# EAGLE board elysium_v0 (EAGLE 6.5.0)
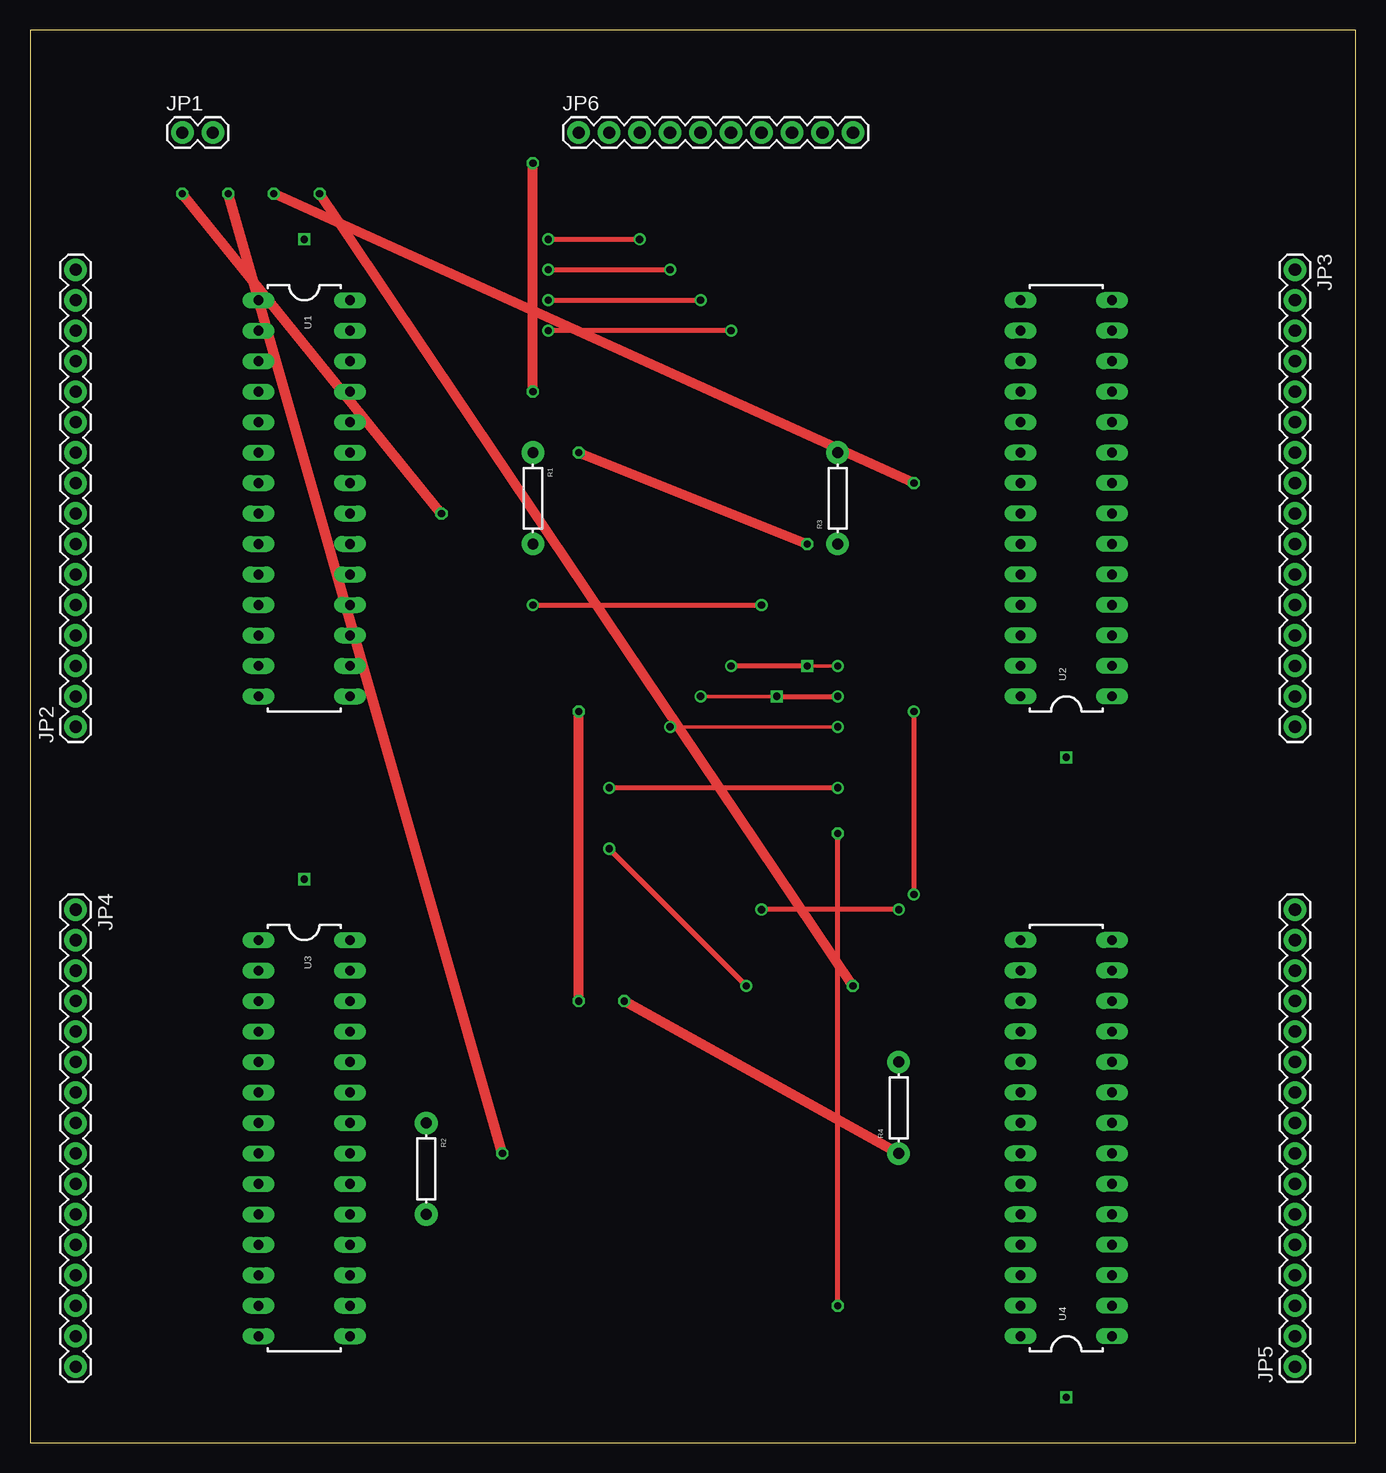
[diagram p0: board, top side]
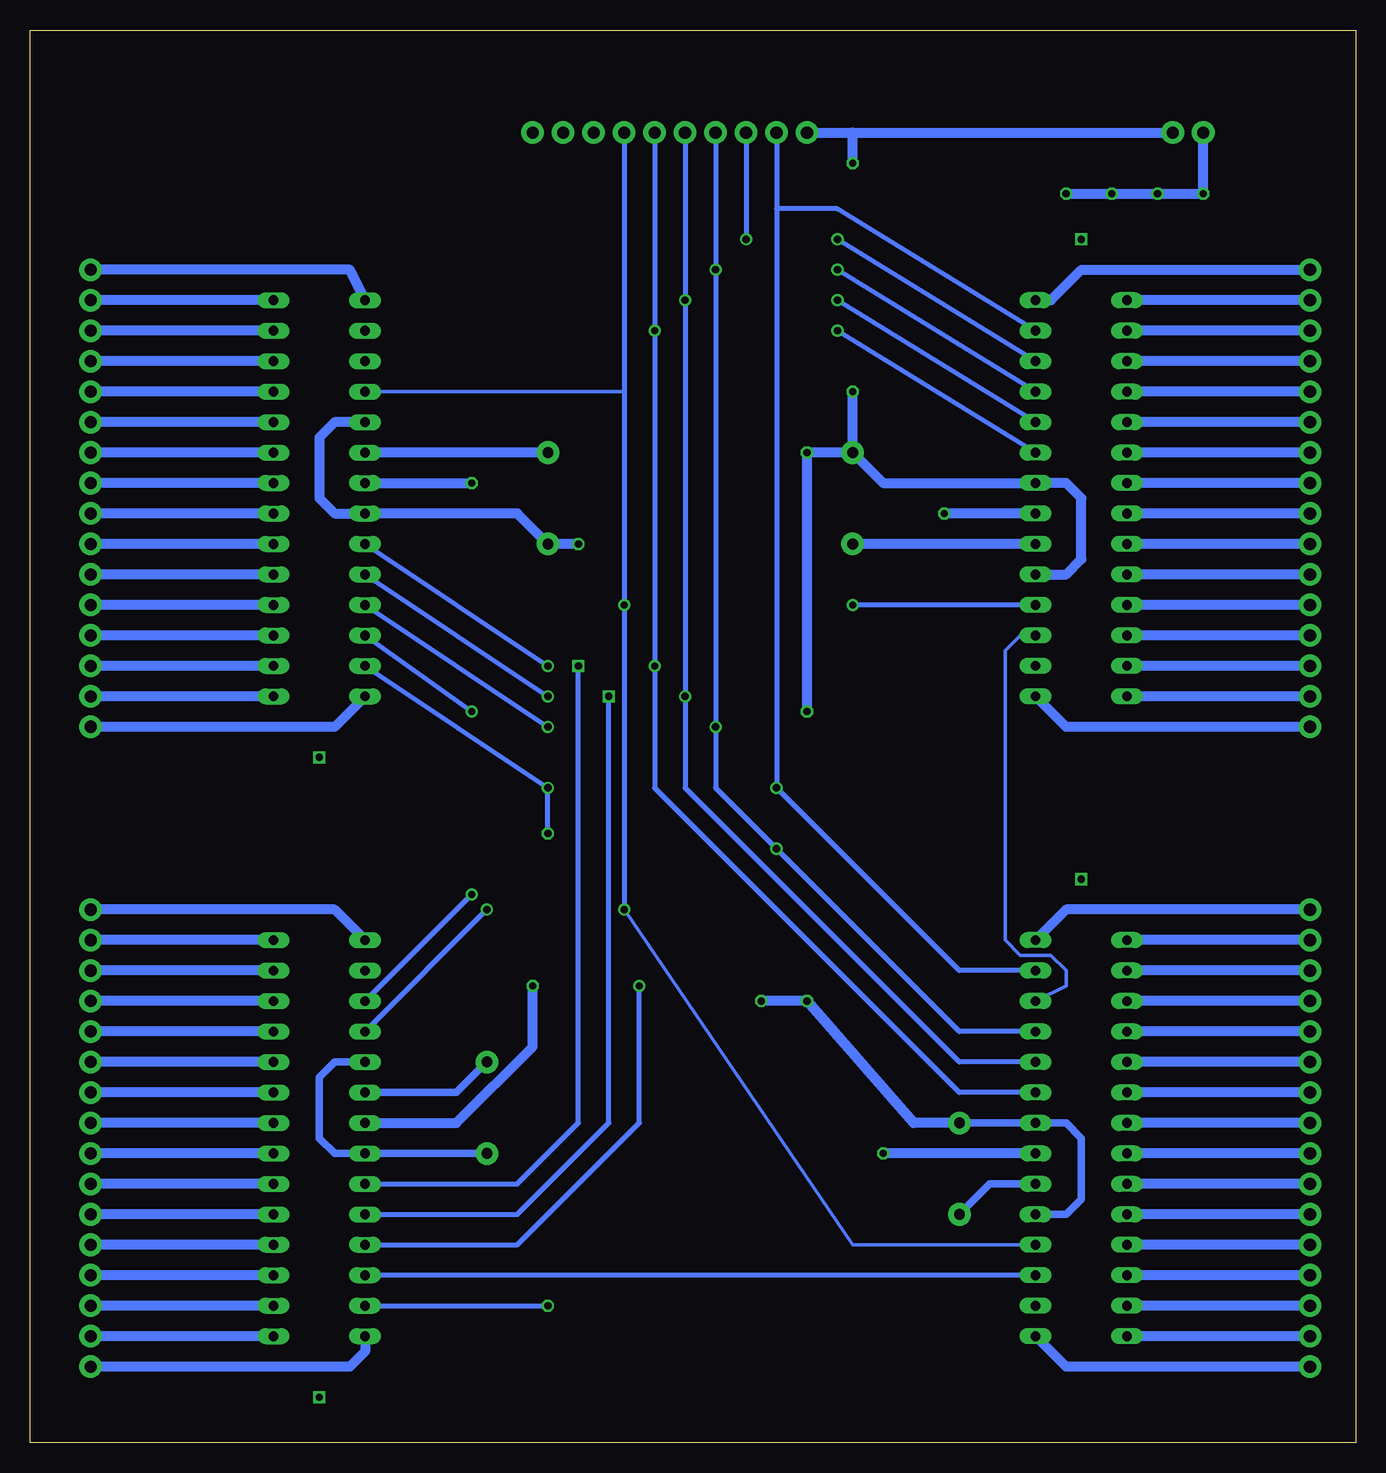
[diagram p1: board, bottom side, seen from below]

Size 110.47 x 117.78 mm. Coordinates in mm from the lower left corner, seen from the top.
Outline: 0,0 110.47,0 110.47,117.78 0,117.78 0,0
Copper layers (1*16): Top 0.035mm / dielectric 1.5mm / Bottom 0.035mm
Design rules "default": minimum track width 10mil, minimum drill 24mil, track to track 8mil, track to pad 8mil, pad to pad 8mil, via to via 8mil, smd to smd 8mil, copper to edge 40mil, drill to drill 8mil, minimum pad ring 10mil, minimum via ring 8mil, stop-mask expansion 4mil, vias tented up to drill 0mil, thermal gap 10mil

## Footprints (pad centres in the part's own frame; a part is rotated, then mirrored left to right if it is on the bottom)
1X02 = drill 1.016 pad 1.88: 1 0,0; 2 2.54,0
1X16 = drill 1.016 pad 1.88: 1 0,0; 2 2.54,0; 3 5.08,0; 4 7.62,0; 5 10.16,0; 6 12.7,0; 7 15.24,0; 8 17.78,0; 9 20.32,0; 10 22.86,0; 11 25.4,0; 12 27.94,0; 13 30.48,0; 14 33.02,0; 15 35.56,0; 16 38.1,0
1X10 = drill 1.016 pad 1.88: 1 0,0; 2 2.54,0; 3 5.08,0; 4 7.62,0; 5 10.16,0; 6 12.7,0; 7 15.24,0; 8 17.78,0; 9 20.32,0; 10 22.86,0
AXIAL-0.3EZ = drill 0.9 pad 1.88: P$1 -3.81,0; P$2 3.81,0
DIL28-3 = drill 0.813 long: 1 -16.51,-3.81; 2 -13.97,-3.81; 3 -11.43,-3.81; 4 -8.89,-3.81; 5 -6.35,-3.81; 6 -3.81,-3.81; 7 -1.27,-3.81; 8 1.27,-3.81; 9 3.81,-3.81; 10 6.35,-3.81; 11 8.89,-3.81; 12 11.43,-3.81; 13 13.97,-3.81; 14 16.51,-3.81; 15 16.51,3.81; 16 13.97,3.81; 17 11.43,3.81; 18 8.89,3.81; 19 6.35,3.81; 20 3.81,3.81; 21 1.27,3.81; 22 -1.27,3.81; 23 -3.81,3.81; 24 -6.35,3.81; 25 -8.89,3.81; 26 -11.43,3.81; 27 -13.97,3.81; 28 -16.51,3.81

## Placement (x,y rotation side)
JP1  M02PTH  [1X02]  12.7,109.22 0 top
JP2  M16PTH  [1X16]  3.81,59.69 90 top
JP3  M16PTH  [1X16]  105.41,97.79 270 top
JP4  M16PTH  [1X16]  3.81,44.45 270 top
JP5  M16PTH  [1X16]  105.41,6.35 90 top
JP6  M10"  [1X10]  45.72,109.22 0 top
R1  [AXIAL-0.3EZ]  41.91,78.74 270 top
R2  [AXIAL-0.3EZ]  33.02,22.86 270 top
R3  [AXIAL-0.3EZ]  67.31,78.74 90 top
R4  [AXIAL-0.3EZ]  72.39,27.94 90 top
U1  TLC5940-NT  [DIL28-3]  22.86,78.74 270 top
U2  TLC5940-NT  [DIL28-3]  86.36,78.74 90 top
U3  TLC5940-NT  [DIL28-3]  22.86,25.4 270 top
U4  TLC5940-NT  [DIL28-3]  86.36,25.4 90 top

## Library data of the parts
JP1-JP6 = SparkFun-Connectors
R1-R4 = SparkFun-Resistors
U1-U4 = SparkFun-DigitalIC

## Nets
BLANK: JP6.6 U1.23 U2.23 U3.23 U4.23
GND: JP1.2 JP6.1 R1.P$1 R2.P$1 R3.P$1 R4.P$1 U1.19 U1.22 U2.19 U2.22 U3.19 U3.22 U4.19 U4.22
GSCLK: JP6.7 U1.18 U2.18 U3.18 U4.18
N$1: JP2.16 U1.28
N$2: JP2.15 U1.1
N$3: JP2.14 U1.2
N$4: JP2.13 U1.3
N$5: JP2.12 U1.4
N$6: JP2.11 U1.5
N$7: JP2.10 U1.6
N$8: JP2.9 U1.7
N$9: JP2.8 U1.8
N$10: JP2.7 U1.9
N$11: JP2.6 U1.10
N$12: JP2.5 U1.11
N$13: JP2.4 U1.12
N$14: JP2.3 U1.13
N$15: JP2.2 U1.14
N$16: JP2.1 U1.15
N$17: JP4.1 U3.28
N$18: JP4.2 U3.1
N$19: JP4.3 U3.2
N$20: JP4.4 U3.3
N$21: JP4.5 U3.4
N$22: JP4.6 U3.5
N$23: JP4.7 U3.6
N$24: JP4.8 U3.7
N$25: JP4.9 U3.8
N$26: JP4.10 U3.9
N$27: JP4.11 U3.10
N$28: JP4.12 U3.11
N$29: JP4.13 U3.12
N$30: JP4.14 U3.13
N$31: JP4.15 U3.14
N$32: JP4.16 U3.15
N$33: JP3.16 U2.28
N$34: JP3.15 U2.1
N$35: JP3.14 U2.2
N$36: JP3.13 U2.3
N$37: JP3.12 U2.4
N$38: JP3.11 U2.5
N$39: JP3.10 U2.6
N$40: JP3.9 U2.7
N$41: JP3.8 U2.8
N$42: JP3.7 U2.9
N$43: JP3.6 U2.10
N$44: JP3.5 U2.11
N$45: JP3.4 U2.12
N$46: JP3.3 U2.13
N$47: JP3.2 U2.14
N$48: JP3.1 U2.15
N$49: JP5.1 U4.28
N$50: JP5.2 U4.1
N$51: JP5.3 U4.2
N$52: JP5.4 U4.3
N$53: JP5.5 U4.4
N$54: JP5.6 U4.5
N$55: JP5.7 U4.6
N$56: JP5.8 U4.7
N$57: JP5.9 U4.8
N$58: JP5.10 U4.9
N$59: JP5.11 U4.10
N$60: JP5.12 U4.11
N$61: JP5.13 U4.12
N$62: JP5.14 U4.13
N$63: JP5.15 U4.14
N$64: JP5.16 U4.15
N$65: U1.17 U3.26
N$66: U3.17 U4.26
N$67: U2.26 U4.17
N$68: R1.P$2 U1.20
N$70: R2.P$2 U3.20
N$71: JP6.8
N$72: JP6.9
N$73: JP6.10
N$75: R3.P$2 U2.20
N$77: R4.P$2 U4.20
SCLK: JP6.4 U1.25 U2.25 U3.25 U4.25
SIN: JP6.3 U1.26
VCC: JP1.1 U1.21 U2.21 U3.21 U4.21
VPRG: JP6.2 U1.27 U2.27 U3.27 U4.27
XLAT: JP6.5 U1.24 U2.24 U3.24 U4.24

## Tracks (layer width: path | path; a pad name or v marks a point on that pad's centre or on a via)
BLANK  (via drill 0.6)
  Top 0.305: v67.31,64.77 v64.77,64.77
  Top 0.406: v58.42,92.71 v43.18,92.71 | v64.77,64.77 v58.42,64.77
  Bottom 0.406: JP6.6 v58.42,92.71 v58.42,64.77 58.42,54.61 33.02,29.21 U3.23 | U1.23 v43.18,92.71 | U2.23 v67.31,64.77 | U4.23 69.85,21.59 64.77,26.67 v64.77,64.77
GND  (via drill 0.6)
  Top 0.813: v41.91,87.63 v41.91,106.68 | v45.72,82.55 v64.77,74.93 | v45.72,36.83 v45.72,60.96 | v49.53,36.83 R4.P$1
  Bottom 0.61: U3.19 24.13,19.05 22.86,20.32 22.86,25.4 24.13,26.67 U3.22 R2.P$1 | U4.19 85.09,31.75 86.36,30.48 86.36,25.4 85.09,24.13 U4.22 R4.P$1
  Bottom 0.813: U1.19 24.13,72.39 22.86,73.66 22.86,78.74 24.13,80.01 U1.22 39.37,80.01 R1.P$1 | U2.19 85.09,85.09 86.36,83.82 86.36,78.74 85.09,77.47 U2.22 69.85,77.47 R3.P$1 v64.77,74.93 | JP6.1 41.91,109.22 | 41.91,109.22 JP1.2 | R1.P$1 v41.91,87.63 | v41.91,106.68 41.91,109.22 | R1.P$1 v45.72,82.55 v45.72,60.96 | R2.P$1 36.83,26.67 v45.72,36.83 v49.53,36.83
GSCLK  (via drill 0.6)
  Top 0.406: v72.39,44.45 v60.96,44.45 | v41.91,69.85 v60.96,69.85
  Bottom 0.305: U2.18 60.96,87.63 | U3.18 41.91,16.51 v60.96,44.45
  Bottom 0.406: JP6.7 60.96,87.63 v60.96,69.85 v60.96,44.45 | U4.18 v72.39,44.45 | U1.18 v41.91,69.85
N$1
  Bottom 0.813: U1.28 25.4,95.25 22.86,97.79 JP2.16
N$2
  Bottom 0.813: JP2.15 U1.1
N$3
  Bottom 0.813: JP2.14 U1.2
N$4
  Bottom 0.813: JP2.13 U1.3
N$5
  Bottom 0.813: JP2.12 U1.4
N$6
  Bottom 0.813: JP2.11 U1.5
N$7
  Bottom 0.813: JP2.10 U1.6
N$8
  Bottom 0.813: JP2.9 U1.7
N$9
  Bottom 0.813: JP2.8 U1.8
N$10
  Bottom 0.813: JP2.7 U1.9
N$11
  Bottom 0.813: JP2.6 U1.10
N$12
  Bottom 0.813: JP2.5 U1.11
N$13
  Bottom 0.813: JP2.4 U1.12
N$14
  Bottom 0.813: JP2.3 U1.13
N$15
  Bottom 0.813: JP2.2 U1.14
N$16
  Bottom 0.813: JP2.1 24.13,59.69 U1.15
N$17
  Bottom 0.813: JP4.1 24.13,44.45 U3.28
N$18
  Bottom 0.813: JP4.2 U3.1
N$19
  Bottom 0.813: JP4.3 U3.2
N$20
  Bottom 0.813: JP4.4 U3.3
N$21
  Bottom 0.813: JP4.5 U3.4
N$22
  Bottom 0.813: JP4.6 U3.5
N$23
  Bottom 0.813: JP4.7 U3.6
N$24
  Bottom 0.813: JP4.8 U3.7
N$25
  Bottom 0.813: JP4.9 U3.8
N$26
  Bottom 0.813: JP4.10 U3.9
N$27
  Bottom 0.813: JP4.11 U3.10
N$28
  Bottom 0.813: JP4.12 U3.11
N$29
  Bottom 0.813: JP4.13 U3.12
N$30
  Bottom 0.813: JP4.14 U3.13
N$31
  Bottom 0.813: JP4.15 U3.14
N$32
  Bottom 0.813: JP4.16 24.13,6.35 U3.15
N$33
  Bottom 0.813: U2.28 85.09,59.69 JP3.16
N$34
  Bottom 0.813: U2.1 JP3.15
N$35
  Bottom 0.813: U2.2 JP3.14
N$36
  Bottom 0.813: U2.3 JP3.13
N$37
  Bottom 0.813: U2.4 JP3.12
N$38
  Bottom 0.813: U2.5 JP3.11
N$39
  Bottom 0.813: U2.6 JP3.10
N$40
  Bottom 0.813: U2.7 JP3.9
N$41
  Bottom 0.813: U2.8 JP3.8
N$42
  Bottom 0.813: U2.9 JP3.7
N$43
  Bottom 0.813: U2.10 JP3.6
N$44
  Bottom 0.813: U2.11 JP3.5
N$45
  Bottom 0.813: U2.12 JP3.4
N$46
  Bottom 0.813: U2.13 JP3.3
N$47
  Bottom 0.813: U2.14 JP3.2
N$48
  Bottom 0.813: U2.15 83.82,97.79 JP3.1
N$49
  Bottom 0.813: U4.28 82.55,7.62 83.82,6.35 JP5.1
N$50
  Bottom 0.813: U4.1 JP5.2
N$51
  Bottom 0.813: U4.2 JP5.3
N$52
  Bottom 0.813: U4.3 JP5.4
N$53
  Bottom 0.813: U4.4 JP5.5
N$54
  Bottom 0.813: U4.5 JP5.6
N$55
  Bottom 0.813: U4.6 JP5.7
N$56
  Bottom 0.813: U4.7 JP5.8
N$57
  Bottom 0.813: U4.8 JP5.9
N$58
  Bottom 0.813: U4.9 JP5.10
N$59
  Bottom 0.813: U4.10 JP5.11
N$60
  Bottom 0.813: U4.11 JP5.12
N$61
  Bottom 0.813: U4.12 JP5.13
N$62
  Bottom 0.813: U4.13 JP5.14
N$63
  Bottom 0.813: U4.14 JP5.15
N$64
  Bottom 0.813: U4.15 85.09,44.45 JP5.16
N$65
  Bottom 0.305: U1.17 27.94,67.31 29.21,66.04 29.21,41.91 27.94,40.64 25.4,40.64 24.13,39.37 24.13,38.1 U3.26
N$66
  Bottom 0.406: U3.17 U4.26
N$67  (via drill 0.6)
  Top 0.406: v73.66,60.96 v73.66,45.72
  Bottom 0.406: U2.26 v73.66,60.96 | v73.66,45.72 U4.17
N$68
  Bottom 0.813: U1.20 R1.P$2
N$69  (via drill 0.6)
  other vias: 86.36,57.15
N$70
  Bottom 0.61: R2.P$2 30.48,21.59 U3.20
N$74  (via drill 0.6)
  other vias: 22.86,46.99
N$75
  Bottom 0.813: R3.P$2 U2.20
N$76  (via drill 0.6)
  other vias: 22.86,100.33
N$77
  Bottom 0.61: R4.P$2 74.93,29.21 U4.20
N$78  (via drill 0.6)
  other vias: 86.36,3.81
SCLK  (via drill 0.6)
  Top 0.305: v67.31,59.69 v53.34,59.69
  Top 0.406: v43.18,97.79 v53.34,97.79 | v59.69,38.1 v48.26,49.53
  Bottom 0.406: JP6.4 v53.34,97.79 v53.34,59.69 53.34,54.61 v48.26,49.53 33.02,34.29 U3.25 | U1.25 v43.18,97.79 | U2.25 v67.31,59.69 | U4.25 69.85,16.51 59.69,26.67 v59.69,38.1
SIN  (via drill 0.6)
  Top 0.406: v43.18,100.33 v50.8,100.33
  Bottom 0.406: JP6.3 v50.8,100.33 | U1.26 v43.18,100.33
VCC  (via drill 0.6)
  Top 0.813: v34.29,77.47 v12.7,104.14 | v39.37,24.13 v16.51,104.14 | v73.66,80.01 v20.32,104.14 | v68.58,38.1 v24.13,104.14
  Bottom 0.813: U1.21 v34.29,77.47 | JP1.1 v12.7,104.14 v16.51,104.14 v20.32,104.14 v24.13,104.14 | U3.21 v39.37,24.13 | U2.21 v73.66,80.01 | U4.21 74.93,26.67 68.58,33.02 v68.58,38.1
VPRG  (via drill 0.6)
  Top 0.406: v67.31,54.61 v48.26,54.61 | v67.31,11.43 v67.31,50.8
  Bottom 0.406: JP6.2 48.26,102.87 | 48.26,102.87 v48.26,54.61 33.02,39.37 U3.27 | U1.27 43.18,102.87 48.26,102.87 | U2.27 v67.31,54.61 v67.31,50.8 | U4.27 v67.31,11.43
XLAT  (via drill 0.6)
  Top 0.305: v62.23,62.23 v55.88,62.23
  Top 0.406: v43.18,95.25 v55.88,95.25 | v62.23,62.23 v67.31,62.23
  Bottom 0.406: JP6.5 v55.88,95.25 v55.88,62.23 55.88,54.61 33.02,31.75 U3.24 | U1.24 v43.18,95.25 | U2.24 v67.31,62.23 | U4.24 69.85,19.05 62.23,26.67 v62.23,62.23